# Altium PCB 0.PcbDoc
Units mil, origin at the board's own origin, x right, y up, seen from the top; angles counter-clockwise.
Board outline 3346.46 x 2283.46 mil, 4 copper layers (Top Layer, Middle1, Middle2, Bottom Layer), stack 30.635 mil thick; 43 components, 70 nets, 243 pads, 132 vias.
Unrouted connection lines stored in the file: 38.
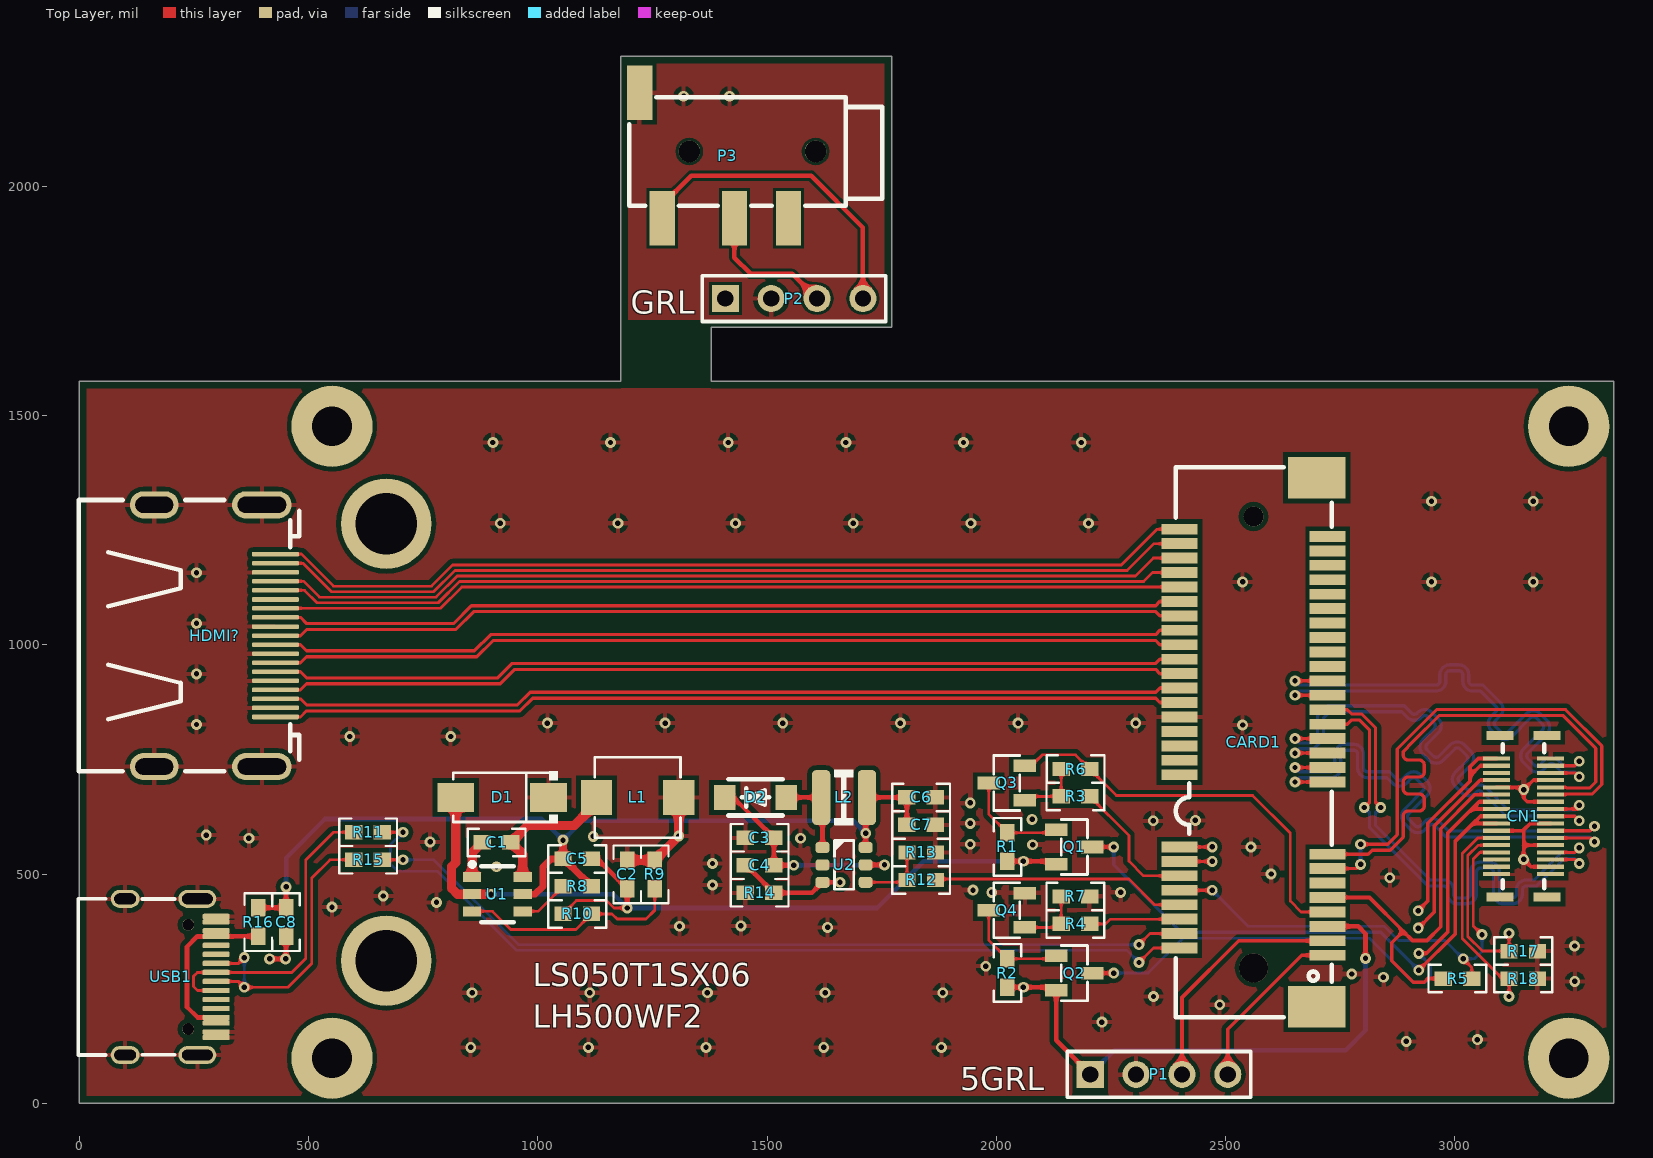
[diagram p0: Top Layer view]
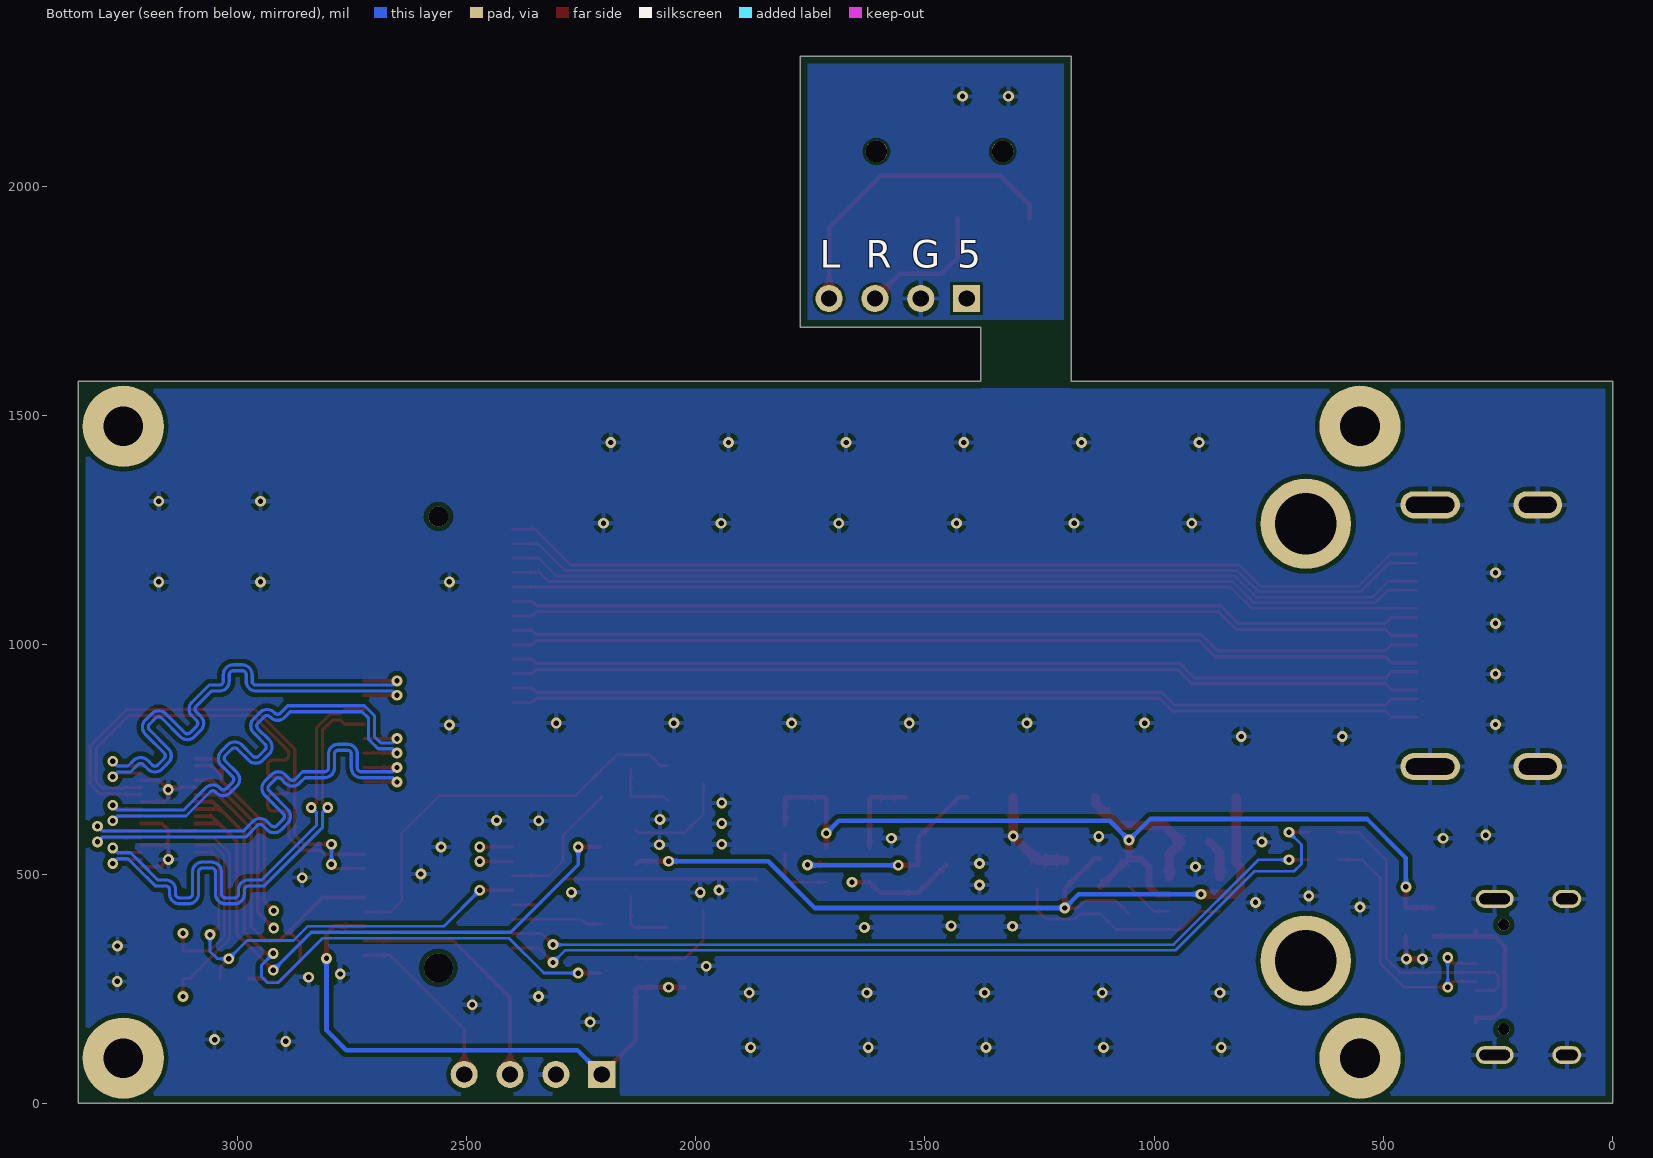
[diagram p1: Bottom Layer view, seen from below]
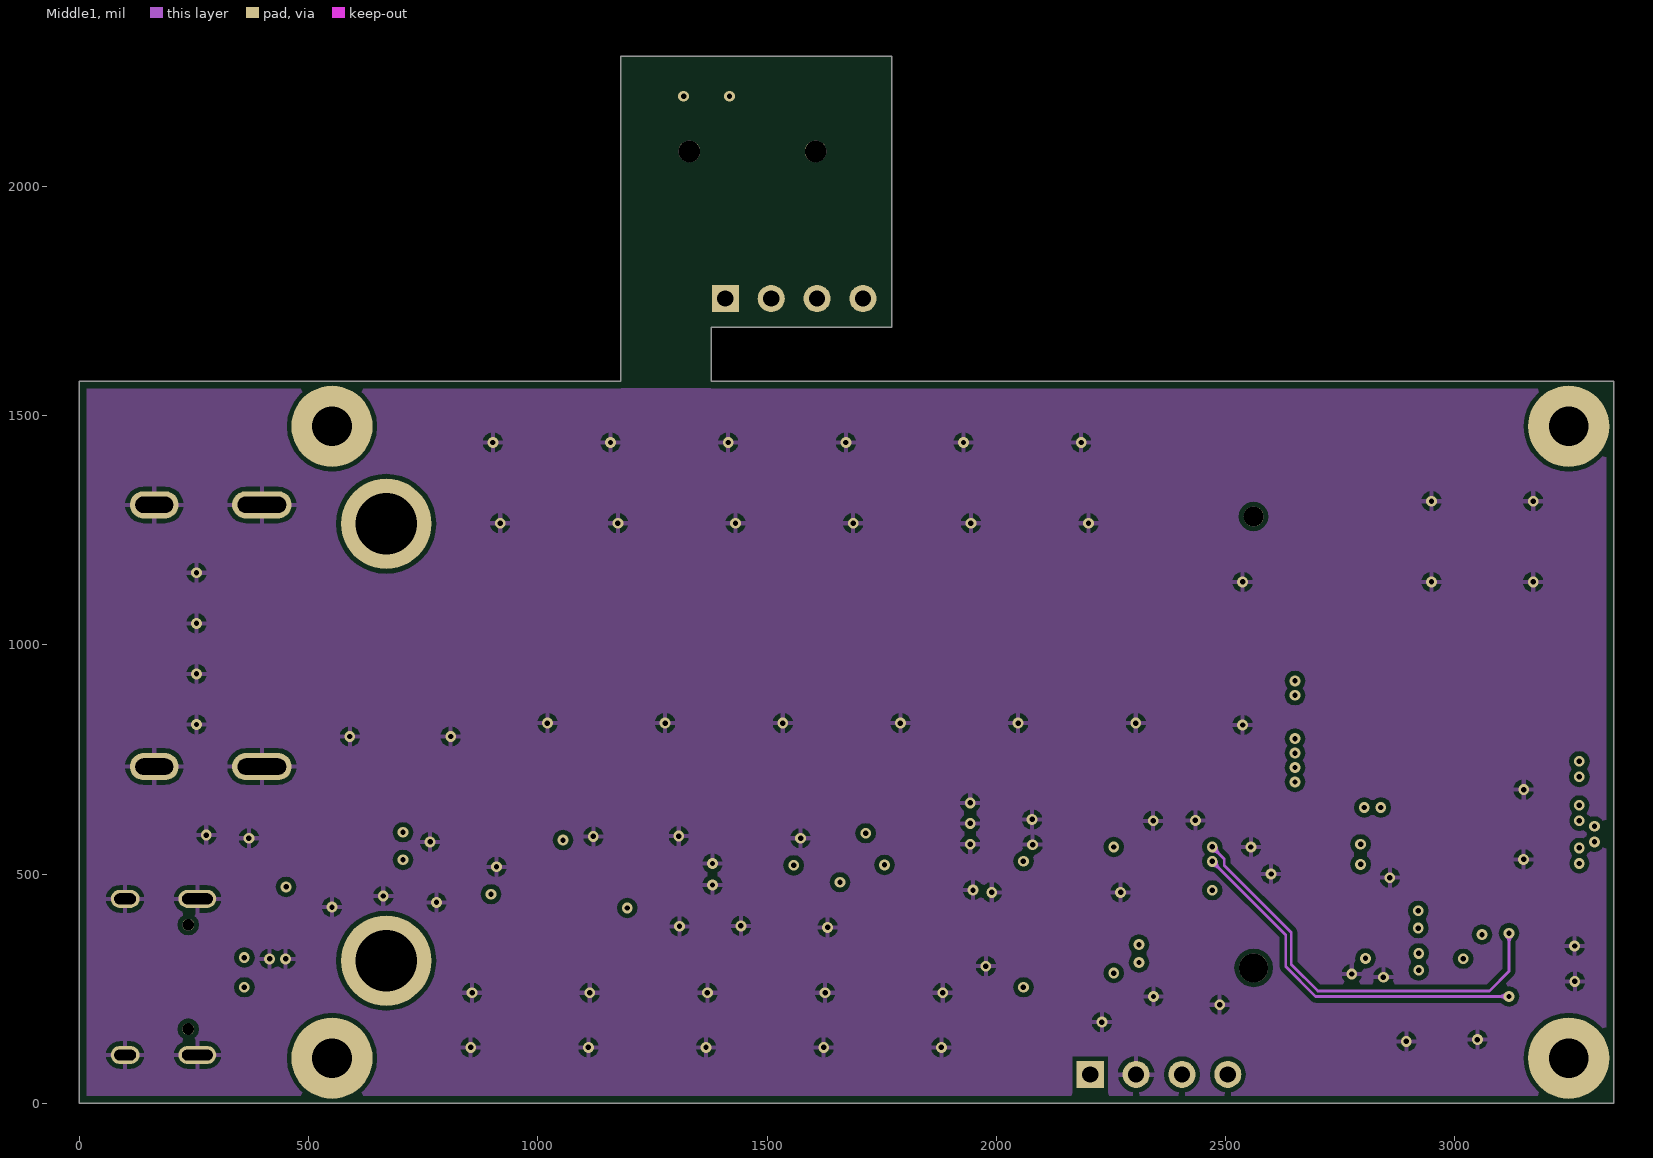
[diagram p2: Middle1]
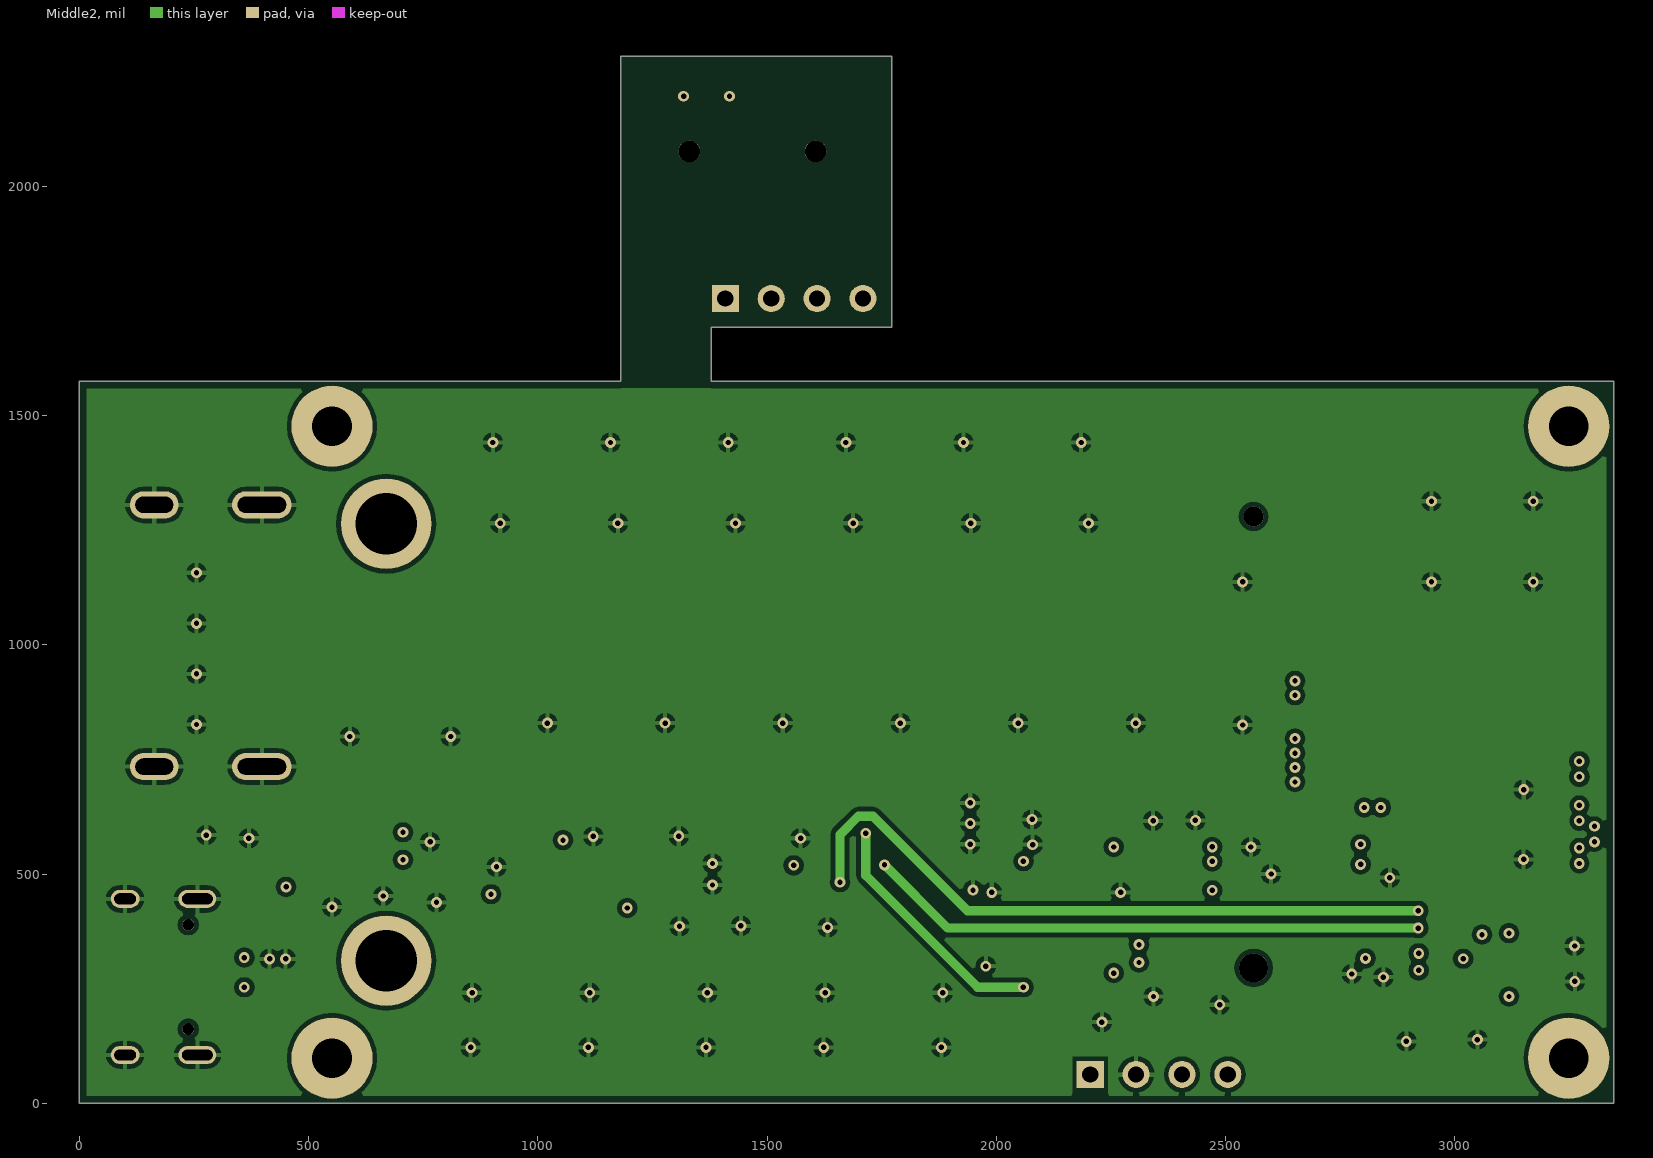
[diagram p3: Middle2]
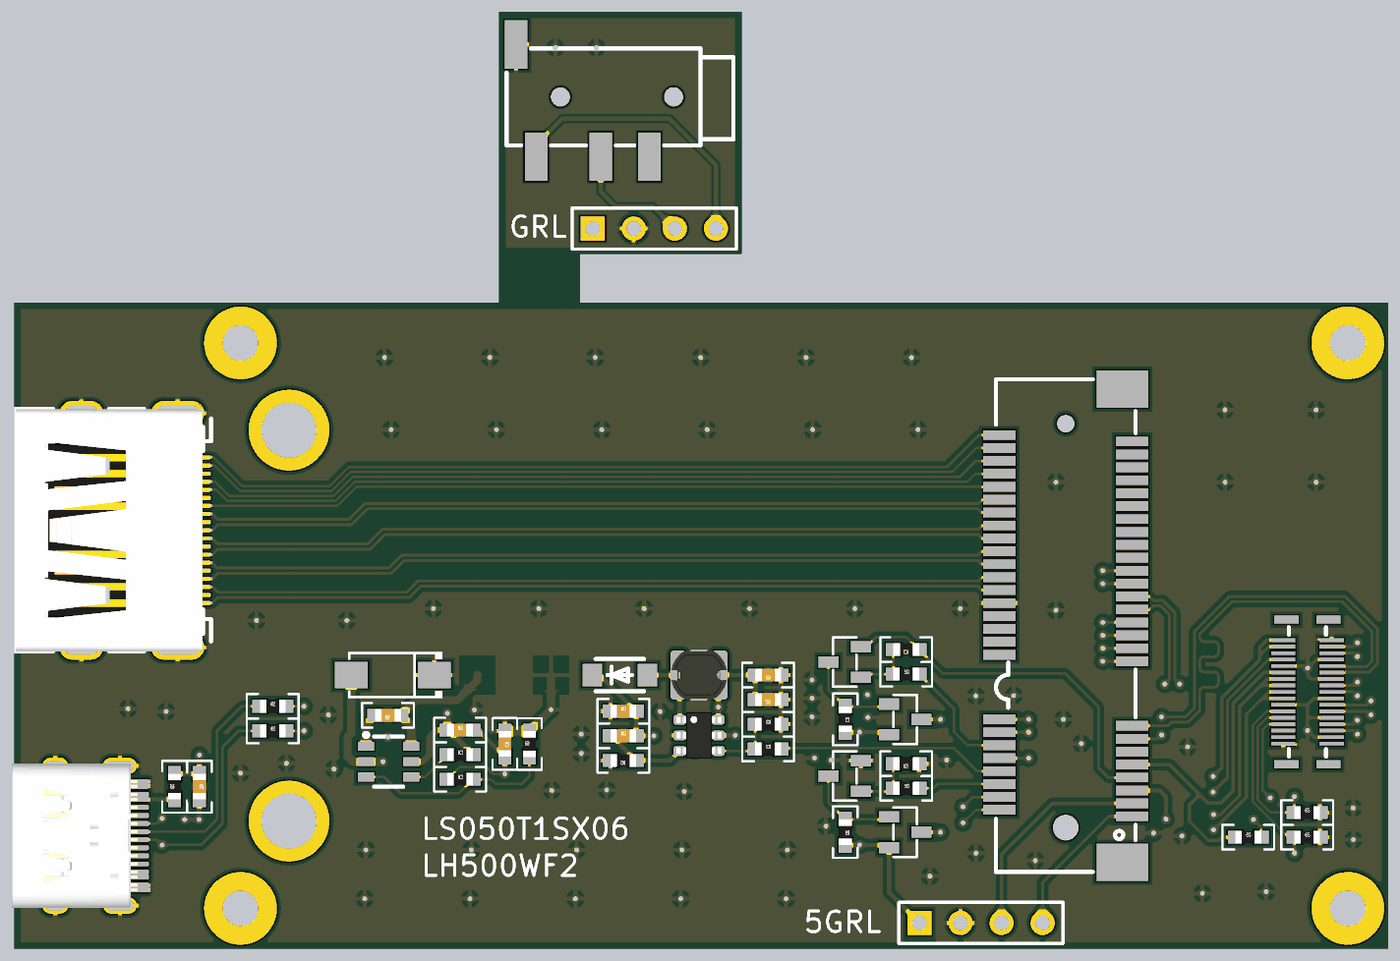
[diagram p4: 3D render of the assembled board from above, using the file's embedded part models]

## Layer stack, top to bottom
Top Solder: solder mask 0.4, Solder Resist, Dk 3.5
Top Layer: signal copper 1.4
Dielectric 1: core 10, FR-4, Dk 4.2
Middle1: signal copper 1.4173
Dielectric 3: prepreg 5, Dk 4.2
Middle2: signal copper 1.4173
Dielectric 2: core 10, Dk 4.2
Bottom Layer: signal copper 1.4
Bottom Solder: solder mask 0.4, Solder Resist, Dk 3.5

## Board outline
0,0 0,1574.8 1181.1,1574.8 1181.1,2283.46 1771.65,2283.46 1771.65,1692.91 1377.95,1692.91 1377.95,1574.8 3346.46,1574.8 3346.46,0

## Design rules (kind name [scope] priority, off if disabled: settings)
BoardOutlineClearance [All] p1: gap=15.75 ignorepadtopadclearanceinfootprint=FALSE
Clearance Clearance_1 [InNamedPolygon('GND_L04_P003') Or  InNamedPolygon('GND_L01_P002') Or  InNamedPolygon('GND_L03_P001') Or  InNamedPolygon('GND_L02_P000')] p1: gap=10 ignorepadtopadclearanceinfootprint=FALSE except(0: Arc-Hole Track-Hole SMDPad-Hole THPad-Hole Via-Hole Fill-Hole Poly-Hole Region-Hole Text-Hole)
Clearance [All] p2: gap=6 ignorepadtopadclearanceinfootprint=FALSE
ComponentClearance [All] p1: gap=0 collisioncheckmode=3 verticalgap=0 showdistances=FALSE
DiffPairsRouting MIPI_DiffPairsRouting [InDifferentialPair ('MIPI0_D0') Or InDifferentialPair ('MIPI0_C') Or InDifferentialPair ('MIPI0_D3') Or InDifferentialPair ('MIPI0_D1') Or InDifferentialPair ('MIPI0_D2')] p1: maxlimit=6 minlimit=6 mostfreqgap=6 toplayer_minwidth=7 toplayer_maxwidth=7 toplayer_prefwidth=7 midlayer1_minwidth=7 midlayer1_maxwidth=7 midlayer1_prefwidth=7 midlayer2_minwidth=7 midlayer2_maxwidth=7 midlayer2_prefwidth=7 bottomlayer_minwidth=7 bottomlayer_maxwidth=7 bottomlayer_prefwidth=7 maxuncoupledlength=500
DiffPairsRouting HDMI_DiffPairsRouting [InDifferentialPair ('HDMI_C') Or InDifferentialPair ('HDMI_D0') Or InDifferentialPair ('HDMI_D1') Or InDifferentialPair ('HDMI_D2')] p2: maxlimit=6 minlimit=6 mostfreqgap=6 toplayer_minwidth=7 toplayer_maxwidth=7 toplayer_prefwidth=7 midlayer1_minwidth=7 midlayer1_maxwidth=7 midlayer1_prefwidth=7 midlayer2_minwidth=7 midlayer2_maxwidth=7 midlayer2_prefwidth=7 bottomlayer_minwidth=7 bottomlayer_maxwidth=7 bottomlayer_prefwidth=7 maxuncoupledlength=500
DiffPairsRouting [All] p3: maxlimit=10 minlimit=10 mostfreqgap=10 toplayer_minwidth=15 toplayer_maxwidth=15 toplayer_prefwidth=15 midlayer1_minwidth=15 midlayer1_maxwidth=15 midlayer1_prefwidth=15 midlayer2_minwidth=15 midlayer2_maxwidth=15 midlayer2_prefwidth=15 bottomlayer_minwidth=15 bottomlayer_maxwidth=15 bottomlayer_prefwidth=15 maxuncoupledlength=500
MatchedLengths MIPI_MatchedLengths [InDifferentialPair ('MIPI0_D0') Or InDifferentialPair ('MIPI0_C') Or InDifferentialPair ('MIPI0_D3') Or InDifferentialPair ('MIPI0_D1') Or InDifferentialPair ('MIPI0_D2')] p1: tolerance=10 checknetsindiffpair=FALSE checkdiffpairvsdiffpair=TRUE checkxsignals=TRUE checkothers=TRUE
MatchedLengths HDMI_MatchedLengths [InDifferentialPair ('HDMI_C') Or InDifferentialPair ('HDMI_D0') Or InDifferentialPair ('HDMI_D1') Or InDifferentialPair ('HDMI_D2')] p2: tolerance=10 checknetsindiffpair=FALSE checkdiffpairvsdiffpair=TRUE checkxsignals=TRUE checkothers=TRUE
MinimumSolderMaskSliver [All] p1: minsoldermaskwidth=0
PolygonConnect [All] p1: connectstyle=Relief reliefconductorwidth=10 reliefentries=4 polygonreliefangle="90 Angle" airgapwidth=10
RoutingVias [All] p1: holewidth=28 width=50 viastyle="Through Hole" minholewidth=28 minwidth=50 maxholewidth=28 maxwidth=50
SilkToSilkClearance [All] p1: silktosilkclearance=0
SilkToSolderMaskClearance [IsPad] p1: minsilkscreentomaskgap=0 clearancetoexposedcopper=TRUE
SolderMaskExpansion [All] p1: expansion=4
Width [All] p1: maxlimit=20 minlimit=6 preferedwidth=10 toplayer_prefwidth=6 bottomlayer_prefwidth=6 minimp=50.000000 maximp=50.000000 favimp=50.000000
25 further rules are at their usual default settings.

## Classes and differential pairs
differential pair class MIPI: MIPI0_C MIPI0_D0 MIPI0_D1 MIPI0_D2 MIPI0_D3
differential pair class HDMI: HDMI_C HDMI_D0 HDMI_D1 HDMI_D2
differential pair MIPI1_D3: +MIPI1_D3_P -MIPI1_D3_N
differential pair MIPI1_D2: +MIPI1_D2_P -MIPI1_D2_N
differential pair MIPI1_D1: +MIPI1_D1_P -MIPI1_D1_N
differential pair MIPI1_D0: +MIPI1_D0_P -MIPI1_D0_N
differential pair MIPI1_C: +MIPI1_C_P -MIPI1_C_N
differential pair MIPI0_D3: +MIPI0_D3_P -MIPI0_D3_N
differential pair MIPI0_D2: +MIPI0_D2_P -MIPI0_D2_N
differential pair MIPI0_D1: +MIPI0_D1_P -MIPI0_D1_N
differential pair MIPI0_D0: +MIPI0_D0_P -MIPI0_D0_N
differential pair MIPI0_C: +MIPI0_C_P -MIPI0_C_N
differential pair HDMI_D2: +HDMI_D2_P -HDMI_D2_N
differential pair HDMI_D1: +HDMI_D1_P -HDMI_D1_N
differential pair HDMI_D0: +HDMI_D0_P -HDMI_D0_N
differential pair HDMI_C: +HDMI_C_P -HDMI_C_N

## Components (designator, comment, footprint, x,y, rotation, side; value= is the part's Value field where it differs from the comment)
C1 "100nF" 0603_CAP 910.1,569 r180 top
C2 "22uF" 0603_CAP 1195,499.1 r270 top
C3 "2.2uf" 0603_CAP 1483.76,579 r0 top value=0.1u
C4 "2.2uf" 0603_CAP 1483.76,519 r0 top value=0.1u
C5 "4.7uF" 0603_CAP 1086.1,533 r0 top
C6 "10uf" 0603_CAP 1835.96,667 r180 top value=0.1u
C7 "0.1uf" 0603_CAP 1835.96,607 r180 top value=0.1u
C8 "22uF" 0603_CAP 451,395.07 r270 top
CARD1 "MPCET-S5201-TP52" MINI-PCIE-SMD_MPCET-S5201-TP40 2561.03,787.4 r90 top
CN1 "BM20B(0.8)-34DS-0.4V(51)" CONN-SMD_34P-P0.40_BM20B-0.8-34DS-0.4V-51 3149.61,625.98 r270 top
D1 "SS24" SMA_L4.4-W2.8-LS5.4-RD 922,667 r180 top
D2 "RSX501L-20" SOD-123F_L2.8-W1.8-LS3.7-RD 1474.93,667 r0 top
HDMI? "HDMI-SWM-19" HDMI-SWM-19 209.29,1019.68 r90 top
L1 "10uH" IND-SMD_L4.5-W4.5_SMMS0420 38217.68,-25333 r180 top
L2 "CD32" IND_CD32 1667.86,667 r180 top value=22uH
P1 "Header 4" HDR1X4 2204.72,63 r0 top
P2 "Header 4" HDR1X4 1409,1755 r0 top
P3 "Header 4" "PJ-320D 3.5" 1429,2075 r180 top
Q1 "AO3400" SOT-23-3 2170,559 r180 top
Q2 "AO3401" SOT-23-3 2170,284 r180 top
Q3 "MMBT3906" SOT-23-3 2022.63,698.6 r0 top
Q4 "MMBT3904" SOT-23-3 2022.63,421 r0 top
R1 "4.7K" 0603_RES 2024,559 r270 top value=22R
R2 "4.7K" 0603_RES 2024,284.1 r270 top value=22R
R3 "1K" 0603_RES 2172.6,669.33 r0 top value=22R
R4 "1K" 0603_RES 2172.6,391.2 r0 top value=22R
R5 "4.7K" 0603_RES 3005.62,272 r0 top value=22R
R6 "100K" 0603_RES 2172.6,729 r180 top value=22R
R7 "100K" 0603_RES 2172.4,451 r180 top value=22R
R8 "10K" 0603_RES 1086.1,473 r0 top
R9 "100K" 0603_RES 1255,499.1 r90 top
R10 "13.7K" 0603_RES 1086.1,413 r0 top
R11 "22R" 0603_RES 629.9,591 r0 top
R12 "10K" 0603_RES 1836.17,487 r0 top value=22R
R13 "100K" 0603_RES 1836.17,547 r0 top value=22R
R14 "10R" 0603_RES 1483.55,459 r180 top value=22R
R15 "22R" 0603_RES 629.9,531 r0 top
R16 "0R" 0603_RES 390.46,395.28 r90 top value=22R
R17 "NC" 0603_RES 3149.1,332 r0 top value=22R
R18 "NC" 0603_RES 3149.1,272 r0 top value=22R
U1 "SY8291ABC" SOT-23-6_L2.9-W1.6-P0.95-LS2.8-BR 912,456 r180 top
U2 "RT9293" SOT23-6 1667.86,520 r0 top
USB1 "Type-C" Type-C-TOP 199.29,275.59 r180 top

## Footprints (in the part's own frame and the unit in brackets; to place one, negate y for a bottom-side part, rotate by r counter-clockwise, add the part's x,y. Pads: shape width x height; smd on the part's side, far side on the other; paste and mask are expansions set on the pad)
0603_CAP [mm]
  rect 0.96x0.8 smd: 1(-0.79,0) 2(0.79,0)
  silkscreen extent -1.6,-0.76 1.6,0.76, body extent -0.81,-0.4 0.79,0.4, height 0.3
0603_RES [mm]
  rect 0.96x0.8 smd: 1(-0.79,0) 2(0.79,0)
  silkscreen extent -1.6,-0.76 1.6,0.76, body extent -0.8,-0.4 0.8,0.4, height 0.3
CONN-SMD_34P-P0.40_BM20B-0.8-34DS-0.4V-51 [mm]
  rect 0.23x1.5 smd: 1(3.2,-1.5) 2(3.2,1.5) 3(2.8,-1.5) 4(2.8,1.5) 5(2.4,-1.5) 6(2.4,1.5) 7(2,-1.5) 8(2,1.5) 9(1.6,-1.5) 10(1.6,1.5) 11(1.2,-1.5) 12(1.2,1.5) 13(0.8,-1.5) 14(0.8,1.5) 15(0.4,-1.5) 16(0.4,1.5) 17(0,-1.5) 18(0,1.5) 19(-0.4,-1.5) 20(-0.4,1.5) 21(-0.8,-1.5) 22(-0.8,1.5) 23(-1.2,-1.5) 24(-1.2,1.5) 25(-1.6,-1.5) 26(-1.6,1.5) 27(-2,-1.5) 28(-2,1.5) 29(-2.4,-1.5) 30(-2.4,1.5) 31(-2.8,-1.5) 32(-2.8,1.5) 33(-3.2,-1.5) 34(-3.2,1.5)
  rect 0.5x1.5 smd: 35(4.475,-1.3) 36(4.475,1.3) 37(-4.475,-1.3) 38(-4.475,1.3)
  silkscreen extent -3.99,-1.15 3.99,1.15
HDMI-SWM-19 [mm] "HDMI-SWM-19"
  rrect50% 0.254x2.6 smd: 1(-4.5,-5.55) 2(-4,-5.55) 3(-3.5,-5.55) 4(-3,-5.55) 5(-2.5,-5.55) 6(-2,-5.55) 7(-1.5,-5.55) 8(-1,-5.55) 9(-0.5,-5.55) 10(0,-5.55) 11(0.508,-5.55) 12(1.016,-5.55) 13(1.524,-5.55) 14(2.007,-5.55) 15(2.515,-5.55) 16(3.023,-5.55) 17(3.505,-5.55) 18(4.013,-5.55) 19(4.521,-5.55)
  oval 1.5x2.7 hole 2.1 slot 0.9 at 0 deg: SH1(-7.25,1.16) SH2(7.25,1.16)
  oval 1.5x3.3 hole 2.7 slot 0.9 at 0 deg: SH3(-7.25,-4.8) SH4(7.25,-4.8)
  silkscreen extent -7.5,-6.86 7.52,5.33, body extent -7.5,-6.78 7.5,5.22, height 6.14
HDR1X4 [mm] "Connector; Header; 4 Position"
  rect 1.5x1.5 hole 0.9: 1(0,0)
  round 1.5 hole 0.9: 2(2.54,0) 3(5.08,0) 4(7.62,0)
  silkscreen extent -1.27,-1.27 8.89,1.27
IND-SMD_L4.5-W4.5_SMMS0420 [mm]
  rect 1.724x1.92 smd: 1(942.078,-660.4) 2(937.522,-660.4)
  silkscreen extent 937.42,-662.63 942.18,-658.17
IND_CD32 [mil]
  rrect50% 40x120 smd: 1(-50,0) 2(50,0)
  silkscreen extent -20,-60 20,60, body extent -68,-59 68,59, height 83
MINI-PCIE-SMD_MPCET-S5201-TP40 [mm]
  rect 0.6x2 smd: 1(-11.8,-4.1) 2(-11.4,4.1) 3(-11,-4.1) 4(-10.6,4.1) 5(-10.2,-4.1) 6(-9.8,4.1) 7(-9.4,-4.1) 8(-9,4.1) 9(-8.6,-4.1) 10(-8.2,4.1) 11(-7.8,-4.1) 12(-7.4,4.1) 13(-7,-4.1) 14(-6.6,4.1) 15(-6.2,-4.1) 16(-5.8,4.1) 17(-2.2,-4.1) 18(-1.8,4.1) 19(-1.4,-4.1) 20(-1,4.1) 21(-0.6,-4.1) 22(-0.2,4.1) 23(0.2,-4.1) 24(0.6,4.1) 25(1,-4.1) 26(1.4,4.1) 27(1.8,-4.1) 28(2.2,4.1) 29(2.6,-4.1) 30(3,4.1) 31(3.4,-4.1) 32(3.8,4.1) 33(4.2,-4.1) 34(4.6,4.1) 35(5,-4.1) 36(5.4,4.1) 37(5.8,-4.1) 38(6.2,4.1) 39(6.6,-4.1) 40(7,4.1) 41(7.4,-4.1) 42(7.8,4.1) 43(8.2,-4.1) 44(8.6,4.1) 45(9,-4.1) 46(9.4,4.1) 47(9.8,-4.1) 48(10.2,4.1) 49(10.6,-4.1) 50(11,4.1) 51(11.4,-4.1) 52(11.8,4.1)
  rect 2.3x3.2 smd: 53(14.65,-3.5) 54(-14.65,-3.5)
  round 1.6 hole 1.6 unplated: ""(-12.5,0)
  round 1.1 hole 1.1 unplated: ""(12.5,0)
  silkscreen extent -15.24,-4.32 15.24,4.32
"PJ-320D 3.5" [mm]
  rect 1.4x3 smd: 1(5.254,-3.268) 2(-2.993,3.683) 3(0.007,3.683) 4(4.007,3.683)
  round 1.2 hole 1.2 unplated: ""(-4.493,-0.02) ""(2.507,-0.02)
  silkscreen extent -8.19,-3.02 5.84,2.98
SMA_L4.4-W2.8-LS5.4-RD [mm]
  rect 2.046x1.62 smd: 1(-2.565,0) 2(2.565,0)
  silkscreen extent -3.08,-1.44 2.7,1.44
SOD-123F_L2.8-W1.8-LS3.7-RD [mm]
  rect 1.2x1.4 smd: 1(-1.7,0) 2(1.7,0)
  silkscreen extent -1.5,-1 1.5,1
SOT23-6 [mil]
  rrect50% 30x24 smd: 1(-47,38) 2(-47,0) 3(-47,-38) 4(47,-38) 5(47,0) 6(47,38)
  silkscreen extent -21,-53 21,53, body extent -55,-57 55,57, height 57
SOT-23-3 [mm]
  rect 1.25x0.7 smd: 1(1,-0.95) 2(1,0.95) 3(-1,0)
  silkscreen extent -0.73,-1.53 0.73,1.53
SOT-23-6_L2.9-W1.6-P0.95-LS2.8-BR [mm]
  rect 1x0.55 smd: 1(1.4,-0.95) 2(1.4,0) 3(1.4,0.95) 4(-1.4,0.95) 5(-1.4,0) 6(-1.4,-0.95)
  silkscreen extent -0.9,-1.78 1.52,1.55
Type-C-TOP [mm]
  round 0.65 hole 0.65: 0(-0.98,2.89) 0(-0.98,-2.89)
  oval 1.6x1 hole 0.6 slot 1.2 at 0 deg: 1(2.52,4.325) 2(2.52,-4.325)
  oval 2.1x1 hole 0.6 slot 1.7 at 0 deg: 3(-1.48,-4.325) 4(-1.48,4.325)
  rrect50% 1.5x0.3 smd: A1(-2.52,-3.35) A4(-2.52,-2.55) A5(-2.52,-1.25) A6(-2.52,-0.25) A7(-2.52,0.25) A8(-2.52,1.25) A9(-2.52,2.55) A12(-2.52,3.35) B1(-2.52,3.05) B4(-2.52,2.25) B5(-2.52,1.75) B6(-2.52,0.75) B7(-2.52,-0.75) B8(-2.52,-1.75) B9(-2.52,-2.25) B12(-2.52,-3.05)
  silkscreen extent -0.22,-4.33 5.12,4.33, body extent -2.57,-4.48 5.18,4.47, height 3.26

## Part data
C1 C2 C5 C8: library part 0.1u, Contributor=LCEDA_Lib, nameAlias=Value(F), spicePre=C, spiceSymbolName=C_0603_US
C3 C4 C6 C7: library part 电容-0402, "Capacitor"
CARD1: BOM_Manufacturer="Argosy Research Inc.", BOM_Manufacturer Part=MPCET-S5201-TP52, BOM_Supplier=LCSC, BOM_Supplier Part=C367018, Contributor=LCSC, spicePre=C, spiceSymbolName=MPCET-S5201-TP52
CN1: BOM_Manufacturer=HRS(Hirose), BOM_Manufacturer Part=BM20B(0.8)-34DS-0.4V(51), BOM_Supplier=LCSC, BOM_Supplier Part=C424541, Contributor=LCSC, spicePre=C, spiceSymbolName=BM20B(0.8)-34DS-0.4V(51)
D1: library part SS24_C181203, BOM_Manufacturer=Hottech, BOM_Manufacturer Part=SS24, BOM_Paste Type=expand, BOM_Supplier=LCSC, BOM_Supplier Part=C181203, Contributor=LCSC, spicePre=D, spiceSymbolName=SS24_C181203
D2: "Diode Schottky 40V 1A Surface Mount SMA _DO-214AC_", Package="DO-214AC-214 ON Semiconductor", Availability=Unavailable, MF="ON Semiconductor", MP=SS14, Price=None, SnapEDA_Link=https://www.snapeda.com/parts/SS14/ON%20Semiconductor/view-part/1413348/?ref=snap
HDMI?: library part HDMI-MC34931HDMI-SWM-19
L1: BOM_Manufacturer=SXN, BOM_Manufacturer Part=SMMS0420-100M, BOM_Paste Type=recommend, BOM_Supplier=LCSC, BOM_Supplier Part=C133195, nameAlias=Inductance, spicePre=L, spiceSymbolName=SMMS0420-100M
L2: library part Ind_CD32, "Inductor", Specification="±5% 100mA", Type=CD32
P1 P2 P3: "Header, 4-Pin", LatestRevisionDate=17-Jul-2002, LatestRevisionNote="Re-released for DXP Platform.", Publisher="Altium Limited"
Q1: library part AO3400_C841146, BOM_JLCPCB Part Class="Extended Part", BOM_Manufacturer=LGE, BOM_Manufacturer Part=AO3400, BOM_Supplier=LCSC, BOM_Supplier Part=C841146, Contributor=LCSC, spicePre=Q, spiceSymbolName=AO3400_C841146
Q2: library part AO3401_C688915, BOM_JLCPCB Part Class="Extended Part", BOM_Manufacturer=LGE, BOM_Manufacturer Part=AO3401, BOM_Supplier=LCSC, BOM_Supplier Part=C688915, Contributor=LCSC, spicePre=Q, spiceSymbolName=AO3401_C688915
Q3: library part MMBT3906_C2833292, BOM_Manufacturer=晶导微电子, BOM_Manufacturer Part=MMBT3906, BOM_Supplier=LCSC, BOM_Supplier Part=C2833292, Contributor=LCSC, spicePre=Q, spiceSymbolName=MMBT3906_C2833292
Q4: library part MMBT3904_C2762221, BOM_JLCPCB Part Class="Extended Part", BOM_Manufacturer=晶导微电子, BOM_Manufacturer Part=MMBT3904, BOM_Supplier=LCSC, BOM_Supplier Part=C2762221, Contributor=LCSC, spicePre=Q, spiceSymbolName=MMBT3904_C2762221
R1 R2 R3 R4 R5 R6 R7 R11 R12 R13 R14 R15 R16 R17 R18: library part 电阻-0402, "Resistor"
R8 R9 R10: library part 1k, Contributor=LCEDA_Lib, nameAlias=Value(Ω), spicePre=R, spiceSymbolName=R_0603_EU
U1: BOM_LCSC Assembly=Yes, BOM_Manufacturer=Silergy, BOM_Manufacturer Part=SY8291ABC, BOM_Supplier=LCSC, BOM_Supplier Part=C125896, SMT Type=Extend, spicePre=U, spiceSymbolName=SY8291ABC
U2: "LCD-LED Driver"
USB1: library part USB-Type-C-TOP

## Free pads (board coordinates)
  round 177.17 hole 86.61: 0(551.18,98.43) 0(551.18,1476.38) 0(3248.03,98.43) 0(3248.03,1476.38)
  round 196.85 hole 133.86: 0(669.29,311.02) 0(669.29,1263.77)

## Via types
v1: diameter 23.62, hole 11.81, Top Layer to Bottom Layer, tented both sides, 132 vias

## Nets (pads, with @x,y where several pads share a name; then routed paths per layer and width w, separated by ;. In a path a pad name is that pad's centre, name@x,y a point inside that pad or via, vN(x,y) a via of type N, cw(c..) or ccw(c..) an arc to the next point about the centre after c; other vN are vias at no path point)
1V1: CARD1.11
1V8: CARD1.9 CN1.23 R5.1 | length 874.1
  Top Layer w8: CARD1.9 2813.58,448.82 2887.2,375.2 ; R5.1 2941,272 2933,264 2909,264 2862,311 2862,350 2887.2,375.2 ; CN1.23 3043.22,673.22 2969,599 2969,385 2939,355 2907.4,355 2887.2,375.2
3V3: CARD1.7 Q3.2 R6.1 | length 899
  Top Layer w6: Q3.2 2076,736 2100,760 2172.7,760 R6.1 2261.7,671 2559,671 2641,589 2641,441 2664.68,417.32 CARD1.7
5V: C5.1 C6.2 C7.2 C8.1 CARD1.5 L2.1 P1.1 P2.1 Q2.2 R2.2 R8.2 R16.2 U1.5 U2.6 | length 3846.9
  Top Layer w10: R16.2 450.8,426.38 C8.1 v1(451,472) ; U2.6 1714.86,664 L2.1 C6.2 C7.2 ; R2.2 v1(2059,253) 2124.23,253 Q2.2 2130.63,137.09 P1.1 ; CARD1.5 2789.18,385.82 2805,370 v1(2805,316)
  Top Layer w15: U1.5 994,456 1011,473 1011,515.2 1028.8,533 C5.1 ; v1(1055,574) C5.1 ; R8.2 1057.2,533 C5.1
  Middle2 w20: v1(1715,589) 1715,497 1959,253 v1(2059,253)
  Bottom Layer w10: v1(451,472) 451,535 536,620 1009,620 v1(1055,574) 1097.02,616.02 1687.98,616.02 v1(1715,589) ; P1.1 2257.72,116 2762,116 2805,159 v1(2805,316)
5V_F: R16.1 USB1.A4 USB1.A9 USB1.B4 USB1.B9 | length 393.1
  Top Layer w6: USB1.A9 USB1.B4
  Top Layer w10: USB1.B4 257.99,187.01 235,210 235,341.62 257.56,364.17 USB1.B9 ; USB1.A4 USB1.B9 ; R16.1 USB1.B9
-5V: C2.2 C5.2 D1.2 Q1.2 R1.2 R10.1 U1.2 | length 1923.3
  Top Layer w6: R10.1 1084,442 1150,442 1166,426 v1(1195,426)
  Top Layer w10: C5.2 1130,533 C2.2 v1(1195,426) ; R1.2 v1(2059,527.9) 2124.33,527.9 Q1.2
  Top Layer w20: D1.2 821,525.21 812,516.2 812,469 825,456 U1.2 v1(898,456)
  Bottom Layer w10: v1(898,456) 1165,456 v1(1195,426) 1740,426 1841.9,527.9 v1(2059,527.9)
AUDIO_L: CARD1.1 P1.4 P2.4 P3.4 | length 1078.4
  Top Layer w8: P1.4 2504.72,161.72 2665.83,322.83 CARD1.1
  Top Layer w10: P3.4 1271.24,1959.24 1335,2023 1596,2023 1709,1910 P2.4
AUDIO_R: CARD1.3 P1.3 P2.3 P3.3 | length 839.6
  Top Layer w8: P1.3 2404.72,230.72 2528.33,354.33 CARD1.3
  Top Layer w10: P3.3 1428.73,1844.27 1464,1809 1555,1809 P2.3
CEC: CARD1.44 HDMI?.13 | length 1991
  Top Layer w6: HDMI?.13 787.95,1079.68 834.25,1125.98 CARD1.44
DDC_SCL: CARD1.46 HDMI?.15 | length 2010.3
  Top Layer w6: HDMI?.15 491.63,1118.68 518.63,1091.68 782.98,1091.68 829.28,1137.98 2321.25,1137.98 2340.74,1157.47 CARD1.46
DDC_SDA: CARD1.48 HDMI?.16 | length 2021.6
  Top Layer w6: HDMI?.16 488.6,1138.68 523.6,1103.68 778.01,1103.68 824.31,1149.98 2303.25,1149.98 2342.24,1188.97 CARD1.48
DN: CARD1.4 R15.2 | length 1825.2
  Top Layer w6: R15.2 v1(706,531) ; v1(2311,346) 2335.08,370.08 CARD1.4
  Bottom Layer w6: v1(706,531) 773,531 958,346 v1(2311,346)
DN_F: R15.1 USB1.A7 USB1.B7 | length 661.6
  Top Layer w6: USB1.A7 347.25,265.75 v1(360,253) 455,253 507,305 507,491.49 546.51,531 R15.1 ; USB1.B7 347.25,305.12 v1(360,317.87)
  Bottom Layer w6: v1(360,253) v1(360,317.87)
DP: CARD1.2 R11.2 | length 1947.9
  Top Layer w6: R11.2 v1(706,591) ; v1(2311,307) 2342.58,338.58 CARD1.2
  Bottom Layer w6: v1(706,591) 679,564 679,522.02 695.02,506 781.03,506 953.03,334 2284,334 v1(2311,307)
DP_F: R11.1 USB1.A6 USB1.B6 | length 681
  Top Layer w6: USB1.B6 257.94,246.06 249,255 249,277 257.43,285.43 USB1.A6 463.43,285.43 494,316 494,531 554,591 R11.1
FB: R9.1 R10.2 U1.3 | length 488.3
  Top Layer w6: U1.3 901.4,418.6 941,379 1083.2,379 R10.2 1161.94,413 1173.21,401.72 1235.72,401.72 1255,421 R9.1
GND: C2.1 C3.1 C6.1 C7.1 C8.2 CARD1.26 CN1.1 CN1.4 CN1.10 CN1.13 CN1.16 CN1.22 CN1.25 CN1.28 CN1.34 D1.1 HDMI?.2 HDMI?.5 HDMI?.8 HDMI?.11 HDMI?.17 HDMI?.SH1 HDMI?.SH2 HDMI?.SH3 HDMI?.SH4 L1.2 P1.2 P2.2 P3.1 Q4.2 R7.1 R9.2 R13.2 R14.2 R17.2 R18.2 U2.2 USB1.1 USB1.2 USB1.3 USB1.4 USB1.A1 USB1.A12 USB1.B1 USB1.B12 | length 824.6
  Top Layer w8: CN1.13 3149.75,594.48 ; CN1.25 3145.03,688.97 v1(3150,684) ; CN1.4 3166.01,515.74 v1(3149.75,532) 3149.75,562.99 ; CN1.10 3149.75,562.99 ; CN1.16 3164.23,610.23 3149.75,595.75 3149.75,562.99 ; CN1.22 3157.95,657.47 3150,665.42 v1(3150,684) ; CN1.28 3170.72,704.72 v1(3150,684)
  Top Layer w10: v1(415,315) v1(450,315) 451,316 C8.2
  Top Layer w20: C2.1 R9.2 v1(1307.37,582.57) L1.2
  other v1: 853.6,122 1110.2,122 1366.8,122 1623.4,122 1880,122 2894,135 3049,139 2230,177 2487,215 2342.58,233 856.6,241 1113.2,241 1369.8,241 1626.4,241 1883,241 3261.48,265.75 2844,275 2775,282 1977,299 3261,343 1632,383.6 1309,386 1443,387 551.18,428 779,438 663,452 1990,460 2271,460 1949,465 1381,476 2858,492 2599,500 910,515.74 1381,523.02 2555,559 2079,564 1943,565 765,570 370,578 1573,578 1121,582 277,585 1943,610.46 2342,616.02 2434,617 2078,619 1943,655 590,800 810,800 2537,825 255.76,826 1021,829 1277.6,829 1534.2,829 1790.8,829 2047.4,829 2304,829 255.76,936.33 255.76,1046.67 2537,1137 2949,1137 3170.72,1137 255.76,1157 918,1265 1174.6,1265 1431.2,1265 1687.8,1265 1944.4,1265 2201,1265 2949,1313 3170.72,1313 902,1441 1158.6,1441 1415.2,1441 1671.8,1441 1928.4,1441 2185,1441 1318,2196 1418,2196
HDMI_C_N: CARD1.42 HDMI?.12 | length 1997.4
  Top Layer w7: HDMI?.12 482.48,1059.68 495.98,1046.18 816.07,1046.18 855.12,1085.24 2347.5,1085.24 2356.74,1094.48 CARD1.42
HDMI_C_P: CARD1.40 HDMI?.10 | length 1997.4
  Top Layer w7: HDMI?.10 482.48,1019.68 495.98,1033.18 821.45,1033.18 860.51,1072.24 2347.5,1072.24 2356.74,1062.99 CARD1.40
HDMI_D0_N: CARD1.38 HDMI?.9 | length 1995.8
  Top Layer w7: HDMI?.9 482.48,1000 495.66,986.81 861.7,986.81 897.13,1022.24 2347.49,1022.24 2356.74,1031.49 CARD1.38
HDMI_D0_P: CARD1.36 HDMI?.7 | length 1995.8
  Top Layer w7: HDMI?.7 482.48,960.63 495.66,973.81 867.08,973.81 902.51,1009.24 2347.49,1009.24 2356.74,999.99 CARD1.36
HDMI_D1_N: CARD1.34 HDMI?.6 | length 1994.2
  Top Layer w7: HDMI?.6 482.48,940.94 495.66,927.76 912.64,927.76 944.14,959.25 2347.49,959.25 2356.74,968.5 CARD1.34
HDMI_D1_P: CARD1.32 HDMI?.4 | length 1994.2
  Top Layer w7: HDMI?.4 482.48,901.57 495.66,914.76 918.03,914.76 949.52,946.25 2347.49,946.25 2356.74,937 CARD1.32
HDMI_D2_N: CARD1.30 HDMI?.3 | length 1992.5
  Top Layer w7: HDMI?.3 482.48,881.89 495.66,868.7 955.79,868.7 983.35,896.26 2347.49,896.26 2356.74,905.51 CARD1.30
HDMI_D2_P: CARD1.28 HDMI?.1 | length 1992.5
  Top Layer w7: HDMI?.1 482.48,842.52 495.66,855.7 961.18,855.7 988.74,883.26 2347.49,883.26 2356.74,874.01 CARD1.28
HDPO: CARD1.52 HDMI?.19 | length 2052.3
  Top Layer w6: HDMI?.19 484.6,1197.68 554.6,1127.68 768.07,1127.68 814.37,1173.98 2272.25,1173.98 2350.23,1251.96 CARD1.52
ID0: CARD1.16 CN1.9 R17.1 | length 1388.6
  Top Layer w6: CN1.9 3050.99,562.99 3028,540 3028,364.17 3060.17,332 R17.1 v1(3118,371)
  Top Layer w7: CARD1.16 v1(2470.77,559.06)
  Middle1 w6: v1(2470.77,559.06) 2497,532.82 2497,518.3 2643,372.3 2643,302.97 2700.97,245 3075,245 3118,288 v1(3118,371)
ID1: CARD1.14 CN1.11 R18.1 | length 1332.4
  Top Layer w6: CN1.11 3049.76,578.73 3016,544.97 3016,359.2 3103.2,272 R18.1 v1(3118,233)
  Top Layer w7: CARD1.14 v1(2470.77,527.57)
  Middle1 w6: v1(2470.77,527.57) 2631,367.33 2631,298 2696,233 v1(3118,233)
MIPI0_C_N: CARD1.23 CN1.20 | length 1115.5
  Top Layer w7: v1@2651.3,795.27 CARD1.23 ; CN1.20 3263,641.73 v1(3271.29,650.02)
  Bottom Layer w7: v1(2651.29,795.27) 2660.54,786.02 2687.08,786.02 2700.29,799.24 2700.29,845.02 2722.1,866.82 2889.49,866.82 2905.53,850.78 ccw(c2911.54,856.79) 2917.55,850.78 2919.32,852.55 cw(c2934.52,837.34) 2949.73,852.55 2963.87,838.4 cw(c2948.67,823.2) 2970.17,823.2 cw(c2948.67,823.2) 2963.87,808 2939.12,783.25 ccw(c2945.13,777.24) 2939.12,771.23 2953.26,757.09 ccw(c2959.27,763.1) 2965.28,757.09 2990.03,781.83 cw(c3005.24,766.63) 3020.44,781.83 3034.58,767.69 cw(c3019.38,752.49) 3040.88,752.49 cw(c3019.38,752.49) 3034.58,737.29 3009.83,712.54 ccw(c3015.84,706.53) 3009.83,700.52 3023.97,686.38 ccw(c3029.98,692.39) 3035.99,686.38 3037.76,688.14 cw(c3052.96,672.94) 3068.17,688.14 3116.79,639.52 3260.79,639.52 v1(3271.29,650.02)
MIPI0_C_P: CARD1.21 CN1.18 | length 1116.1
  Top Layer w7: v1@2651.3,763.78 CARD1.21 ; CN1.18 3261.33,625.98 v1(3271.29,616.02)
  Bottom Layer w7: v1(2651.29,763.78) 2660.54,773.02 2692.46,773.02 2709.48,790.04 2713.29,793.85 2713.29,839.63 2727.48,853.82 2884.1,853.82 2896.34,841.59 ccw(c2911.54,856.79) 2926.75,841.59 2928.51,843.35 cw(c2934.52,837.34) 2940.53,843.35 2954.68,829.21 cw(c2948.67,823.2) 2957.17,823.2 cw(c2948.67,823.2) 2954.68,817.19 2929.93,792.44 ccw(c2945.13,777.24) 2929.93,762.04 2944.07,747.89 ccw(c2959.27,763.1) 2974.48,747.89 2999.22,772.64 cw(c3005.24,766.63) 3011.25,772.64 3025.39,758.5 cw(c3019.38,752.49) 3027.88,752.49 cw(c3019.38,752.49) 3025.39,746.48 3000.64,721.73 ccw(c3015.84,706.53) 3000.64,691.33 3014.78,677.18 ccw(c3029.98,692.39) 3045.19,677.18 3046.95,678.95 cw(c3052.96,672.94) 3058.98,678.95 3111.41,626.52 3260.79,626.52 v1(3271.29,616.02)
MIPI0_D0_N: CARD1.15 CN1.26 | length 1173.1
  Top Layer w7: CARD1.15 2810.57,543.3 2819.29,552.02 2858.68,552.02 2887.29,580.63 2887.29,622 2887.29,626.42 cw(c2898.39,626.42) 2898.39,637.52 2922.19,637.52 ccw(c2922.19,648.62) 2933.29,648.62 2933.29,663.42 ccw(c2922.19,663.42) 2922.19,674.52 2898.39,674.52 cw(c2898.39,685.62) 2887.29,685.62 2887.29,700.42 cw(c2898.39,700.42) 2898.39,711.52 2922.19,711.52 ccw(c2922.19,722.62) 2933.29,722.62 2933.29,737.42 ccw(c2922.19,737.42) 2922.19,748.52 2898.39,748.52 cw(c2898.39,759.62) 2887.29,759.62 2887.29,767.02 2908.29,788.02 2966.29,846.02 3235.29,846.02 3307.29,774.02 3307.29,700.6 3294.29,687.6 3243.06,687.6 3241.69,688.97 CN1.26
MIPI0_D0_P: CARD1.13 CN1.24 | length 1114.5
  Top Layer w7: CARD1.13 2785.08,511.81 v1(2794.29,521.02) ; v1(2794.29,565.02) 2853.29,565.02 2874.29,586.02 2874.29,772.4 2878.1,776.21 2960.91,859.02 3240.68,859.02 3244.48,855.21 3320.29,779.4 3320.29,695.21 3299.68,674.6 3243.06,674.6 3241.69,673.22 CN1.24
  Bottom Layer w7: v1(2794.29,521.02) v1(2794.29,565.02)
MIPI0_D1_N: CARD1.19 CN1.14 | length 1115.2
  Top Layer w7: v1@2651.3,732.28 CARD1.19 ; CN1.14 3294.75,594.48 v1(3304.29,604.02)
  Bottom Layer w7: v1(2651.29,732.28) 2660.54,723.03 2729.29,723.03 ccw(c2729.29,731.53) 2737.79,731.53 2737.79,761.53 cw(c2759.29,761.53) 2759.29,783.03 2779.29,783.03 cw(c2779.29,761.53) 2800.79,761.53 2800.79,731.53 ccw(c2809.29,731.53) 2809.29,723.03 2857.29,723.03 2873.33,706.98 ccw(c2879.34,712.99) 2885.35,706.98 2894.9,716.53 cw(c2910.1,701.32) 2925.3,716.53 2939.45,702.38 cw(c2924.24,687.18) 2945.74,687.18 cw(c2924.24,687.18) 2939.45,671.98 2899.14,631.67 ccw(c2905.15,625.66) 2899.14,619.65 2913.28,605.51 ccw(c2919.29,611.52) 2925.3,605.51 2934.85,615.06 cw(c2950.05,599.85) 2965.25,615.06 2986.79,593.52 3293.79,593.52 v1(3304.29,604.02)
MIPI0_D1_P: CARD1.17 CN1.12 | length 1114.8
  Top Layer w7: v1@2651.3,700.78 CARD1.17 ; CN1.12 3295.58,578.73 v1(3304.29,570.02)
  Bottom Layer w7: v1(2651.29,700.78) 2660.54,710.03 2729.29,710.03 ccw(c2729.29,731.53) 2750.79,731.53 2750.79,761.53 cw(c2759.29,761.53) 2759.29,770.03 2779.29,770.03 cw(c2779.29,761.53) 2787.79,761.53 2787.79,731.53 ccw(c2809.29,731.53) 2809.29,710.03 2851.9,710.03 2864.14,697.79 ccw(c2879.34,712.99) 2894.54,697.79 2904.09,707.33 cw(c2910.1,701.32) 2916.11,707.33 2930.25,693.19 cw(c2924.24,687.18) 2932.74,687.18 cw(c2924.24,687.18) 2930.25,681.17 2889.95,640.87 ccw(c2905.15,625.66) 2889.95,610.46 2904.09,596.32 ccw(c2919.29,611.52) 2934.5,596.32 2944.04,605.86 cw(c2950.05,599.85) 2956.06,605.86 2981.41,580.52 3293.79,580.52 v1(3304.29,570.02)
MIPI0_D2_N: CARD1.27 CN1.8 | length 1114.9
  Top Layer w7: CARD1.27 2765.31,858.26 2774.56,849.02 2796.68,849.02 2826.81,818.88 2826.81,656.58 v1(2838.33,645.06) ; CN1.8 3261.51,547.24 v1(3271.29,557.02)
  Bottom Layer w7: v1(2838.33,645.06) 2826.81,633.54 2826.81,606.31 2946.1,487.02 2975.6,487.02 cw(c2975.6,465.52) 2997.1,465.52 2997.1,456.52 ccw(c3005.6,456.52) 3005.6,448.02 3025.6,448.02 ccw(c3025.6,456.52) 3034.1,456.52 3034.1,504.52 cw(c3055.6,504.52) 3055.6,526.02 3075.6,526.02 cw(c3075.6,504.52) 3097.1,504.52 3097.1,456.52 ccw(c3105.6,456.52) 3105.6,448.02 3125.6,448.02 ccw(c3125.6,456.52) 3134.1,456.52 3134.1,465.52 cw(c3155.6,465.52) 3155.6,487.02 3172.91,487.02 3210.1,524.21 3232.41,546.52 3260.79,546.52 v1(3271.29,557.02)
MIPI0_D2_P: CARD1.25 CN1.6 | length 1114.3
  Top Layer w7: CARD1.25 2765.31,826.77 2774.56,836.02 2791.29,836.02 2813.81,813.5 2813.81,656.58 v1(2802.29,645.06) ; CN1.6 3262.82,531.49 v1(3271.29,523.02)
  Bottom Layer w7: v1(2802.29,645.06) 2813.81,633.54 2813.81,600.93 2940.72,474.02 2975.6,474.02 cw(c2975.6,465.52) 2984.1,465.52 2984.1,456.52 ccw(c3005.6,456.52) 3005.6,435.02 3025.6,435.02 ccw(c3025.6,456.52) 3047.1,456.52 3047.1,504.52 cw(c3055.6,504.52) 3055.6,513.02 3075.6,513.02 cw(c3075.6,504.52) 3084.1,504.52 3084.1,456.52 ccw(c3105.6,456.52) 3105.6,435.02 3125.6,435.02 ccw(c3125.6,456.52) 3147.1,456.52 3147.1,465.52 cw(c3155.6,465.52) 3155.6,474.02 3178.29,474.02 3219.29,515.02 3237.79,533.52 3260.79,533.52 v1(3271.29,523.02)
MIPI0_D3_N: CARD1.31 CN1.32 | length 1115.5
  Top Layer w7: v1@2651.3,921.26 CARD1.31 ; CN1.32 3261.48,736.21 v1(3271.29,746.02)
  Bottom Layer w7: v1(2651.29,921.26) 2660.54,912.01 2958.61,912.01 ccw(c2958.61,920.51) 2967.11,920.51 2967.11,934.71 cw(c2988.61,934.71) 2988.61,956.21 3008.61,956.21 cw(c3008.61,934.71) 3030.11,934.71 3030.11,920.51 ccw(c3038.61,920.51) 3038.61,912.01 3061.31,912.01 3098.27,875.04 cw(c3083.07,859.83) 3104.57,859.83 cw(c3083.07,859.83) 3098.27,844.63 3088.23,834.59 ccw(c3094.24,828.58) 3088.23,822.57 3102.38,808.43 ccw(c3108.39,814.44) 3114.4,808.43 3155.69,849.72 cw(c3170.89,834.52) 3186.1,849.72 3200.24,835.58 cw(c3185.04,820.38) 3206.54,820.38 cw(c3185.04,820.38) 3200.24,805.17 3158.94,763.88 ccw(c3164.95,757.87) 3158.94,751.86 3173.09,737.72 ccw(c3179.1,743.73) 3185.11,737.72 3195.15,747.76 cw(c3210.35,732.55) 3225.55,747.76 3237.79,735.52 3260.79,735.52 v1(3271.29,746.02)
MIPI0_D3_P: CARD1.29 CN1.30 | length 1114.9
  Top Layer w7: v1@2651.3,889.76 CARD1.29 ; CN1.30 3262.85,720.47 v1(3271.29,712.02)
  Bottom Layer w7: v1(2651.29,889.76) 2660.54,899.01 2958.61,899.01 ccw(c2958.61,920.51) 2980.11,920.51 2980.11,934.71 cw(c2988.61,934.71) 2988.61,943.21 3008.61,943.21 cw(c3008.61,934.71) 3017.11,934.71 3017.11,920.51 ccw(c3038.61,920.51) 3038.61,899.01 3055.92,899.01 3089.08,865.84 cw(c3083.07,859.83) 3091.57,859.83 cw(c3083.07,859.83) 3089.08,853.82 3079.04,843.78 ccw(c3094.24,828.58) 3079.04,813.38 3093.18,799.24 ccw(c3108.39,814.44) 3123.59,799.23 3164.88,840.53 cw(c3170.89,834.52) 3176.9,840.53 3191.05,826.39 cw(c3185.04,820.38) 3193.54,820.38 cw(c3185.04,820.38) 3191.05,814.37 3149.75,773.07 ccw(c3164.95,757.87) 3149.75,742.67 3163.89,728.52 ccw(c3179.1,743.73) 3194.3,728.52 3204.34,738.57 cw(c3210.35,732.55) 3216.36,738.57 3232.41,722.52 3260.79,722.52 v1(3271.29,712.02)
MIPI1_C_N: CARD1.43
MIPI1_C_P: CARD1.41
MIPI1_D0_N: CARD1.35
MIPI1_D0_P: CARD1.33
MIPI1_D1_N: CARD1.39
MIPI1_D1_P: CARD1.37
MIPI1_D2_N: CARD1.47
MIPI1_D2_P: CARD1.45
MIPI1_D3_N: CARD1.51
MIPI1_D3_P: CARD1.49
NetC1_1: C1.1 L1.1 U1.6 | length 321.3
  Top Layer w20: U1.6 967.12,543.09 C1.1 978.2,606 1079.98,606 1128,654.02 L1.1
NetC1_2: C1.2 U1.1 | length 84.8
  Top Layer w20: U1.1 856.88,546.88 C1.2
NetD2_2: D2.2 L2.2 U2.1 | length 186.2
  Top Layer w10: D2.2 L2.2 1620.86,664 U2.1
NetQ1_1: Q1.1 Q3.3 R1.1 | length 234.6
  Top Layer w6: Q3.3 1983.26,630.84 R1.1 2124.33,590.1 Q1.1
NetQ2_1: Q2.1 Q4.3 R2.1 | length 231.9
  Top Layer w6: Q4.3 1983.26,355.94 R2.1 2124.43,315.2 Q2.1
NetQ3_1: Q3.1 R3.1 R6.2 | length 142.5
  Top Layer w6: Q3.1 2070.13,669.33 R3.1 R6.2
NetQ4_1: Q4.1 R4.1 R7.2 | length 142.5
  Top Layer w6: Q4.1 2133.9,383.6 R4.1 2141.3,391.4 R7.2
NetR8_1: R8.1 U1.4 | length 110.4
  Top Layer w6: U1.4 1000.6,418.6 R8.1
NetR12_1: R12.1 R13.1 U2.4 | length 152.3
  Top Layer w6: U2.4 1800.06,482 R12.1 R13.1
P_RES: CARD1.10 CN1.7 R5.2 | length 1044.8
  Top Layer w6: v1(3018,315.2) 3036.73,296.48 R5.2 ; v1(3059,368) 3040,387 3040,533 3054.24,547.24 CN1.7
  Top Layer w7: CARD1.10 v1(2470.77,464.57)
  Bottom Layer w6: v1(2470.77,464.57) 2549.33,386 2846,386 2877,355 2978.2,355 v1(3018,315.2) 3042.8,315.2 3059,331.4 v1(3059,368)
PA7: CARD1.24
PA9: CARD1.8 R12.2 | length 556.3
  Top Layer w6: R12.2 1869.27,489 2289,489 2344.93,433.07 CARD1.8
PA10: CARD1.6 R4.2 | length 200.2
  Top Layer w6: R4.2 2238.2,391.2 2248.57,401.57 CARD1.6
PB0: CARD1.22
PB1: CARD1.20
PB12: CARD1.18
PB15: CARD1.12 R3.2 | length 300.5
  Top Layer w6: R3.2 2289,584.03 2289,528 2320.94,496.06 CARD1.12
VHDMI: CARD1.50 HDMI?.18 | length 2040.9
  Top Layer w6: HDMI?.18 487.63,1177.68 549.63,1115.68 773.04,1115.68 819.34,1161.98 2285.25,1161.98 2343.74,1220.47 CARD1.50
VLED+: C3.2 C4.2 CN1.27 D2.1 U2.5 | length 2121.4
  Top Layer w8: v1(2920,382) 2955,417 2955,604.8 3054.92,704.72 CN1.27
  Top Layer w10: D2.1 1426.86,667 C3.2 C4.2 v1(1558,519) ; U2.5 v1(1756,520)
  Middle2 w20: v1(1756,520) 1894,382 v1(2920,382)
  Bottom Layer w10: v1(1558,519) 1755,519 v1(1756,520)
VLED-: C4.1 CN1.31 CN1.33 R14.1 U2.3 | length 2200.2
  Top Layer w8: U2.3 v1(1659,482) ; v1(2920,420) 2941,441 2941,610.6 3033,702.6 3033,714 ; CN1.31 3055.21,736.21 3033,714 ; CN1.33 3050.96,751.96 3033,734 3033,714
  Top Layer w10: C4.1 1454.66,519 R14.1 1597.86,459 U2.3
  Middle2 w20: v1(1659,482) 1659,586 1699,626 1731,626 1937,420 v1(2920,420)
VSN: CN1.15 CN1.17 Q1.3 | length 1324.2
  Top Layer w8: Q1.3 v1(2255.95,559) ; v1(2921,290) 3001,370 3001,572 3039.23,610.23 ; CN1.15 3039.23,610.23 ; CN1.17 3054.98,625.98 3039.23,610.23
  Bottom Layer w8: v1(2255.95,559) 2255.95,520.05 2403,373 2838,373 v1(2921,290)
VSP: CN1.19 CN1.21 Q2.3 | length 1363.2
  Top Layer w8: Q2.3 v1(2255.95,284) ; v1(2921,327) 2938,327 2984,373 2984,589 3036.73,641.73 ; CN1.19 3036.73,641.73 ; CN1.21 3052.47,657.47 3036.73,641.73
  Bottom Layer w6: v1(2255.95,284) 2331,284 2407,360 2814,360 2911,263 2934,263 2947,276 2947,301 v1(2921,327)
pads on no net: CARD1. CARD1.53 CARD1.54 CN1.2 CN1.3 CN1.5 CN1.29 CN1.35 CN1.36 CN1.37 CN1.38 HDMI?.14 P3. P3.2 USB1.0 USB1.A5 USB1.A8 USB1.B5 USB1.B8

## Polygon pours and split planes (outlines as drawn)
GND on Bottom Layer "GND_L04_P003" (solid, remove dead copper, pour order 3): 0,0 0,1574.8 3346.46,1574.8 3346.46,0
GND on Bottom Layer "Bottom Layer-GND" (solid, pour order 6): 1772,1693 1182,1693 1182,2283 1772,2283
GND on Top Layer "GND_L01_P002" (solid, remove dead copper, pour order 2): 0,0 0,1574.8 3346.46,1574.8 3346.46,0
GND on Top Layer "Top Layer-GND" (solid, pour order 4): 1772,1693 1182,1693 1182,2283 1772,2283
GND on Middle2 "GND_L03_P001" (solid, remove dead copper, pour order 1): 0,0 0,1574.8 3346.46,1574.8 3346.46,0
GND on Middle1 "GND_L02_P000" (solid, remove dead copper, pour order 0): 0,0 0,1574.8 3346.46,1574.8 3346.46,0

## Other copper
Top Layer:
  pour cut-out: 1377.95,1709 1181.1,1709 1181.1,1559 1377.95,1559
Middle1:
  pour cut-out: 1377.95,1709 1181.1,1709 1181.1,1559 1377.95,1559
Middle2:
  pour cut-out: 1377.95,1709 1181.1,1709 1181.1,1559 1377.95,1559
Bottom Layer:
  pour cut-out: 1377.95,1709 1181.1,1709 1181.1,1559 1377.95,1559

## Silkscreen, mask and mechanical layers (free items; w line width, h text height)
Top Overlay:
  text "GRL" at 1203,1722 h50
  text "LS050T1SX06" at 989,255 h50
  text "LH500WF2" at 989,165 h50
  text "5GRL" at 1921,28 h50
Bottom Overlay:
  text "5" at 1430,1822 h60
  text "G" at 1529.67,1822 h60
  text "R" at 1629.33,1822 h60
  text "L" at 1729,1822 h60
Mechanical 1:
  lines w10: 0,0 0,1574.8 1181.1,1574.8 1181.1,1692.91 1181.1,2283.46 1771.65,2283.46 1771.65,1692.91 1377.95,1692.91 1377.95,1574.8 3346.46,1574.8 3346.46,0 0,0
Mechanical 5:
  text "Top Layer / Middle1 / Middle2 / Bottom Layer" at 2089.46,-325.2 h40